# Altium PCB 2018-12-17_02-16-20.PcbDoc
Units mil, origin at the board's own origin, x right, y up, seen from the top; angles counter-clockwise.
Board outline 3500 x 5100 mil, 4 copper layers (Top Layer, MidLayer1, MidLayer2, Bottom Layer); 36 components, 19 nets, 102 pads, 114 vias.
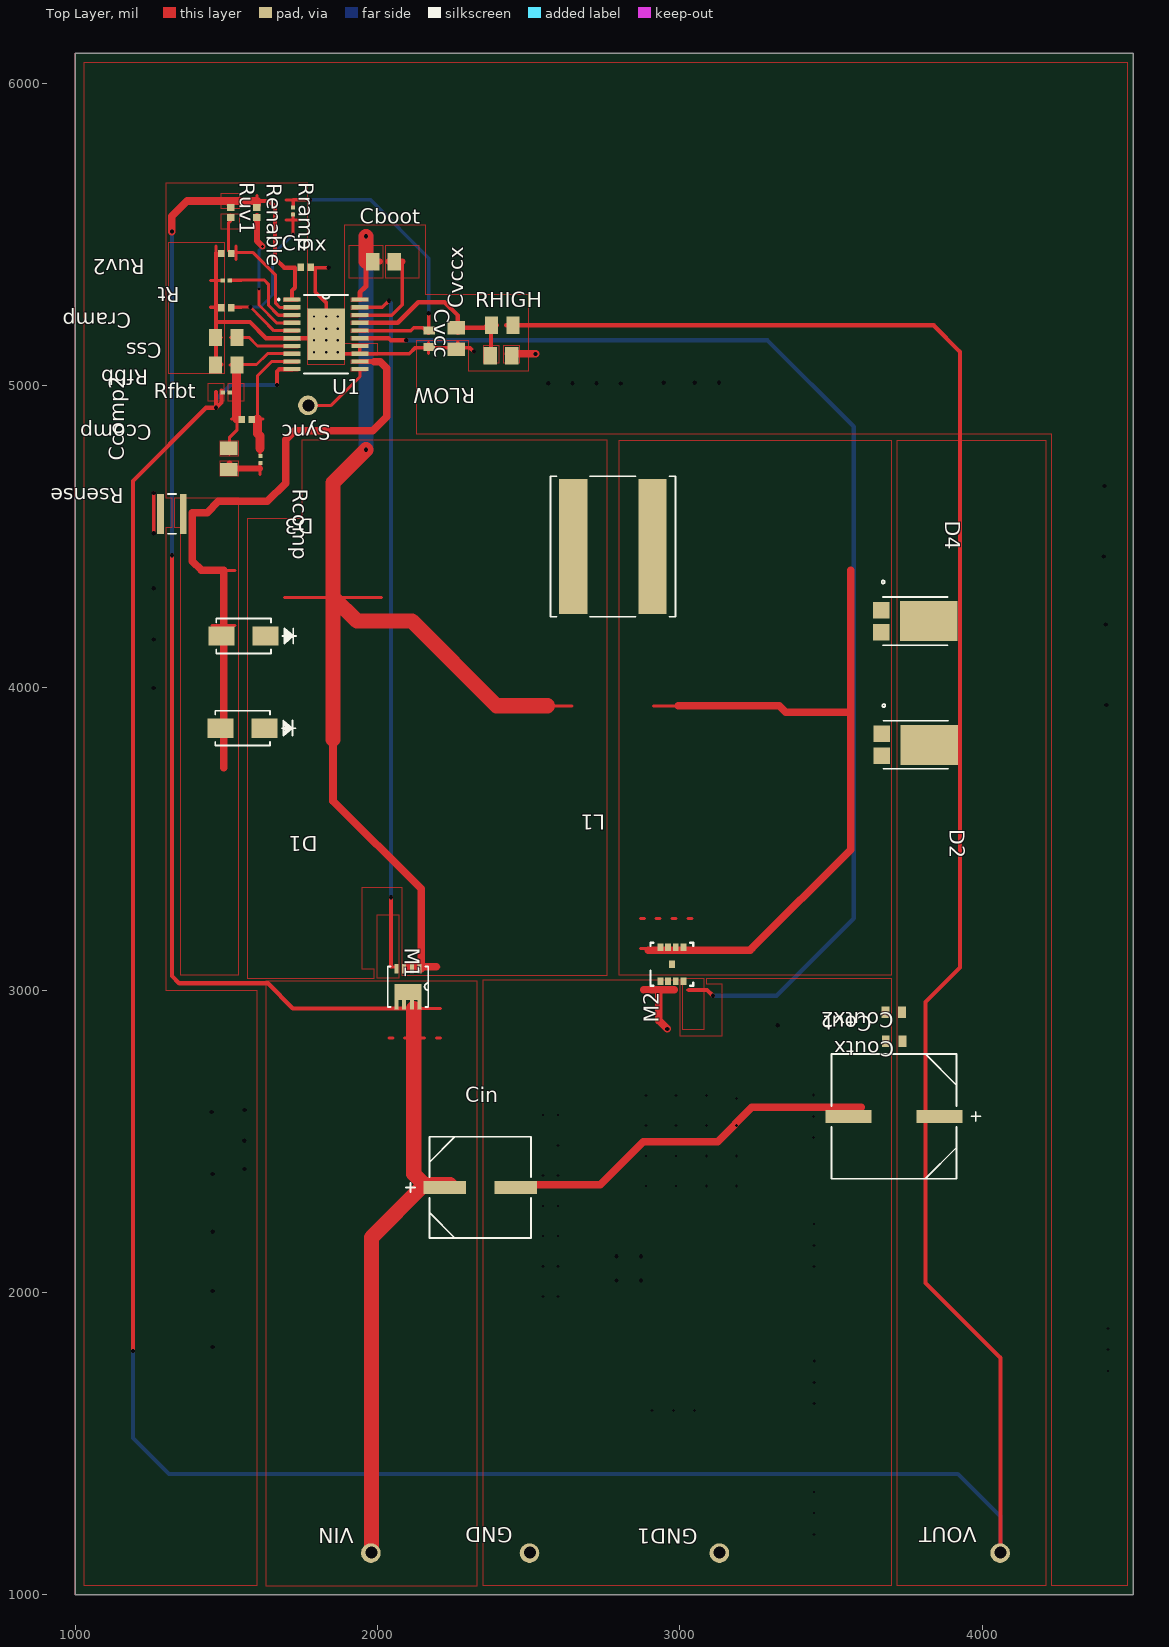
[diagram p0: Top Layer view]
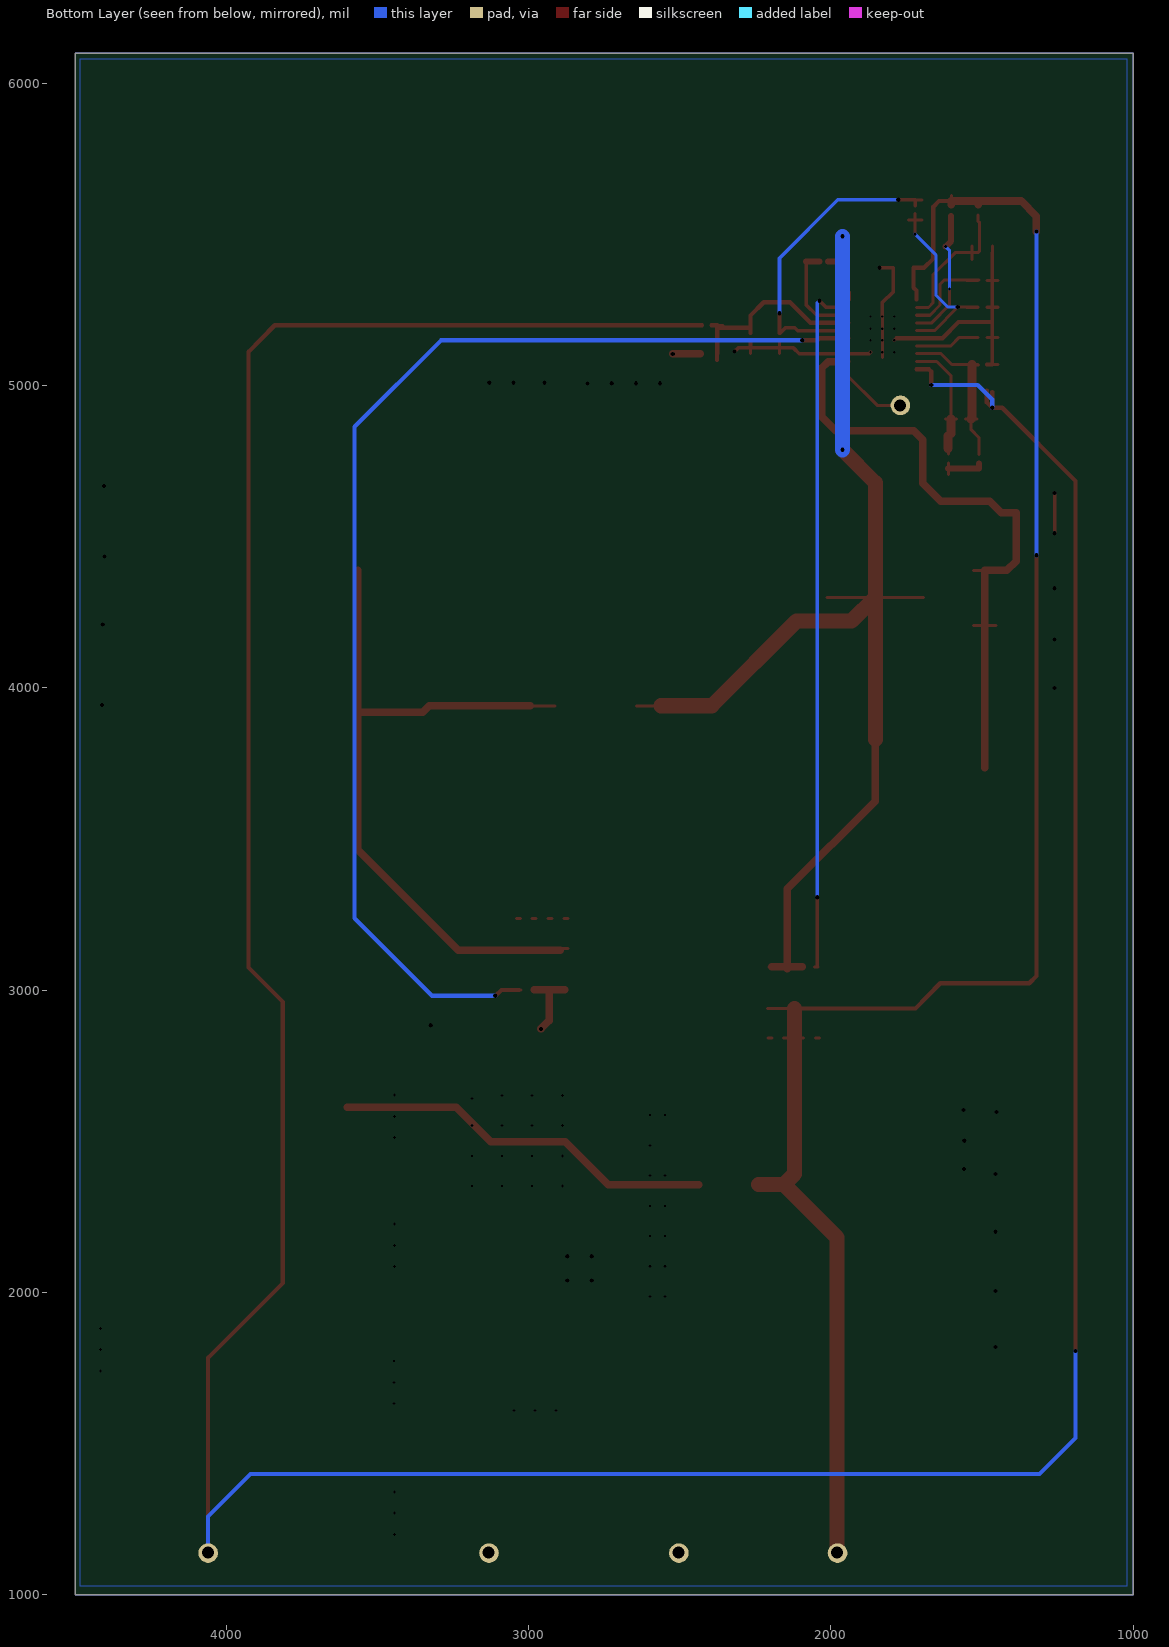
[diagram p1: Bottom Layer view, seen from below]

## Layer stack, top to bottom
Top Layer: signal copper 1.4
Dielectric: core 12.6, FR-4, Dk 4.8
MidLayer1: signal copper 1.4
Dielectric: prepreg 12.6, FR-4, Dk 4.8
MidLayer2: signal copper 1.4
Dielectric: core 12.6, FR-4, Dk 4.8
Bottom Layer: signal copper 1.4

## Board outline
1000,1000 4500,1000 4500,6100 1000,6100

## Design rules (kind name [scope] priority, off if disabled: settings)
PlaneConnect [All] p0: scope1count=1 scope1_0_kind=Board scope1_0_value=Board scope2count=1 scope2_0_kind=Board scope2_0_value=Board commentlength=0 planeconnectstyle=Direct reliefexpansion=20 reliefentries=4 reliefconductorwidth=10 reliefairgap=10
PlaneConnect [All] p1: planeconnectstyle=Direct reliefexpansion=20 reliefentries=4 reliefconductorwidth=10 reliefairgap=10
PolygonConnect [All] p0: scope1count=1 scope1_0_kind=Board scope1_0_value=Board scope2count=1 scope2_0_kind=Board scope2_0_value=Board commentlength=0 connectstyle=Direct reliefconductorwidth=10 reliefentries=4 polygonreliefangle="90 Angle"
PolygonConnect [All] p1: connectstyle=Direct reliefconductorwidth=10 reliefentries=4 polygonreliefangle="90 Angle"

## Components (designator, comment, footprint, x,y, rotation, side; value= is the part's Value field where it differs from the comment)
Cboot "" 0805 2020,5410 r0 top
Ccomp "" 0402 1568,4888 r180 top
Ccomp2 "" 0805 1508,4758 r90 top
Cin "" CAPSMT_62_E12 2340,2348 r0 top
Cinx "" 0402 1763,5392 r0 top
Cout "" CAPSMT_62_F12 3709,2583 r180 top
Coutx "" 0603 3709,2831 r180 top
Coutx2 "" 0603 3708,2928 r180 top
Cramp "" 0402 1500,5258 r180 top
Css "" 0805 1500,5159 r180 top
Cvcc "" 0603 2172,5155 r270 top
Cvccx "" 0805 2261,5156 r90 top
D1 "" SMA 1554,3867 r180 top
D2 "" PowerDI5 3781,3812 r270 top
D3 "" SMA 1557,4172 r180 top
D4 "" PowerDI5 3779,4221 r270 top
GND "" TP-1502 2503,1138 r180 top
GND1 "" TP-1502 3131,1138 r180 top
L1 "" XAL1010 2779,4468 r180 top
M1 "" PG-TSDSON-8 2101,3012 r270 top
M2 "" DQG0008A 2974,3086 r90 top
Rcomp "" 0201 1613,4756 r270 top
Renable "" 0402 1601,5573 r270 top
Rfbb "" 0805 1500,5068 r180 top
Rfbt "" 0201 1500,4978 r0 top
RHIGH "" 0805 2413,5200 r0 top
RLOW "" 0805 2409,5099 r180 top
Rramp "" 0201 1721,5578 r270 top
Rsense "" 0612 1320,4576 r180 top
Rt "" 0201 1500,5348 r180 top
Ruv1 "" 0402 1515,5573 r270 top
Ruv2 "" 0402 1500,5437 r180 top
Sync "" TP-1502 1770,4935 r180 top
U1 "" MXA20A 1830,5170 r0 top
VIN "" TP-1502 1978,1138 r180 top
VOUT "" TP-1502 4060,1138 r180 top

## Footprints (in the part's own frame and the unit in brackets; to place one, negate y for a bottom-side part, rotate by r counter-clockwise, add the part's x,y. Pads: shape width x height; smd on the part's side, far side on the other; paste and mask are expansions set on the pad)
0201 [mil]
  rect 14x13 smd: 1(-11.5,0) 2(11.5,0)
0402 [mil]
  rect 22x24 smd: 1(-16.5,0) 2(16.5,0)
0603 [mil]
  rect 26x38 smd: 1(-27.5,0) 2(27.5,0)
0612 [mil]
  rect 22x132 smd: 1(-37.5,0) 2(37.5,0)
  silkscreen extent -13,-66 13,66
0805 [mil]
  rect 44x57 smd: 1(-35.5,0) 2(35.5,0)
CAPSMT_62_E12 [mil]
  rect 140x43 smd: 1(-117,0) 2(117,0)
  silkscreen extent -246,-168 168,168
CAPSMT_62_F12 [mil]
  rect 152x43 smd: 1(-150.5,0) 2(150.5,0)
  silkscreen extent -286,-207 207,207
DQG0008A [mm]
  rect 0.63x0.5 smd: 1(-1.435,0.975) 2(-1.435,0.325) 3(-1.435,-0.325) 4(-1.435,-0.975) 5(1.435,-0.975) 6(1.435,-0.325) 7(1.435,0.325) 8(1.435,0.975) 9(0,0)
  silkscreen extent -1.8,-1.8 1.8,1.8
MXA20A [mil]
  rect 56x14 smd: 1(-112,115.16) 2(-112,89.57) 3(-112,63.98) 4(-112,38.39) 5(-112,12.8) 6(-112,-12.8) 7(-112,-38.39) 8(-112,-63.98) 9(-112,-89.57) 10(-112,-115.16) 11(112,-115.16) 12(112,-89.57) 13(112,-63.98) 14(112,-38.39) 15(112,-12.8) 16(112,12.8) 17(112,38.39) 18(112,63.98) 19(112,89.57) 20(112,115.16)
  rect 124x171 smd: 21(0,0)
  silkscreen extent -160,-130 74,130
PG-TSDSON-8 [mil]
  rect 31x13 smd: 1(-59.5,38.39) 2(-59.5,12.8) 3(-59.5,-12.8) 4(-59.5,-38.39) 5(59.5,-38.39) 6(59.5,-12.8) 7(59.5,12.8) 8(59.5,38.39)
  rect 52x90 smd: 9(18,0)
  silkscreen extent -67,-67 67,67
PowerDI5 [mil]
  rect 55x55 smd: 1(-36.22,-112.5) 3(36.22,-112.5)
  rect 132x191 smd: 2(0,44.5)
  silkscreen extent -134,-111 80,108
SMA [mil]
  rect 86x64 smd: 1(-73,0) 2(73,0)
  silkscreen extent -174,-58 90,58
TP-1502 [mil]
  round 65 / inner round 0 / far side round 65 hole 32: 1(0,0)
XAL1010 [mil]
  rect 94x445 smd: 1(-131,0) 2(131,0)
  silkscreen extent -207,-233 207,233

## Via types
v1: diameter 0, hole 10, Top Layer to Bottom Layer, 50 vias
v2: diameter 0, hole 14, Top Layer to Bottom Layer, 47 vias
v3: diameter 0, hole 8, Top Layer to Bottom Layer, 12 vias
v4: diameter 0, hole 40, Top Layer to Bottom Layer, 5 vias

## Nets (pads, with @x,y where several pads share a name; then routed paths per layer and width w, separated by ;. In a path a pad name is that pad's centre, name@x,y a point inside that pad or via, vN(x,y) a via of type N, cw(c..) or ccw(c..) an arc to the next point about the centre after c; other vN are vias at no path point)
0: Cin.2 Cinx.2 Cout.2 Coutx2.2 Coutx.2 Cramp.2 Css.2 Cvcc.2 Cvccx.1 GND1.1 GND.1 M2.1 M2.2 M2.3 Rfbb.2 RLOW.1 Rsense.2 Rt.2 Ruv2.2 U1.6 U1.13 U1.14 U1.17 U1.21 | length 4390.8
  Top Layer w10: Rfbb.2@1447,5069.5 Rfbb.2@1484,5069.5 ; Css.2@1447,5159.5 Css.2@1484,5159.5 ; 1447,5259.5 Cramp.2@1484,5259.5 ; 1447,5348.5 Rt.2@1484,5348.5 ; 1465.5,5417 1465.5,5462 ; U1.21@1829,5094 U1.21@1829,5245 ; 2169.5,5106 2169.5,5143 ; Cvccx.1@2265.5,5106 2265.5,5143 ; 2265.5,5173 2265.5,5210 ; 2357,5199.5 2394,5199.5 ; 2875,3001.5 2886,3001.5 ; 2925,3001.5 2936,3001.5 ; 2975,3001.5 2986,3001.5
  Top Layer w12: v2(1260,4512) 1260,4580 v2(1260,4645) ; Css.2@1466,5155 1466,5070 Rfbb.2@1484,5070 ; Css.2@1466,5160 1466,5260 1466,5349 1466,5440 ; U1.21@1783,5157 v3(1790,5150) ; v3(1830,5229) 1830,5275 1794,5310 1794,5390 v2(1839,5390) ; v3(1869,5110) 1874,5106 U1.13 ; U1.14@1942,5131 U1.13 ; 2266,5144 Cvccx.1@2266,5125 ; v2(2319,5113) 2306,5125 Cvccx.1@2266,5125 ; U1.13 2105,5106 2124,5125 2170,5125 Cvccx.1@2266,5125
  Top Layer w14: 1472,5211 1578,5211 1631,5157 1717,5157 U1.21@1783,5157 ; U1.17@1942,5208 2067,5208 2135,5276 2222,5276 2266,5232 2266,5192 ; 2266,5174 2266,5192 ; 2377,5085 2377,5105 2376,5106 2376,5200 ; 2395,5200 2376,5200 ; 2266,5192 2369,5192 2376,5200
  Top Layer w25: RLOW.1@2432,5105 2444,5105 v2(2523,5105) ; Cin.2@2437,2357 2737,2357 2879,2499 3125,2499 3239,2613 3600,2613 ; 2881,3001 2931,3001 ; v2(2959,2872) 2931,2900 2931,3001 ; 2981,3001 2931,3001
  other v1: 3444,1200 3444,1270 3444,1340 2909,1609 2979,1609 3049,1609 3445,1633 3445,1703 4416,1741 3445,1773 4416,1811 4416,1881 2548,1987 2598,1987 3444,2086 2548,2087 2598,2087 3444,2156 2548,2187 2598,2187 3444,2226 2548,2287 2598,2287 2888,2352 2988,2352 3088,2352 3188,2352 2548,2387 2598,2387 2888,2452 2988,2452 3088,2452 3188,2452 2598,2487 3443,2513 2888,2552 2988,2552 3088,2552 3188,2552 3443,2583 2548,2587 2598,2587 3188,2642 2888,2652 2988,2652 3088,2652 3443,2653
  other v2: 1455,1820 1455,2005 2791,2040 2872,2040 2791,2120 2872,2120 1455,2201 1455,2392 1560,2409 1559,2502 1452,2597 1561,2604 3324,2884 4411,3944 1260,4000 1260,4160 4409,4210 1260,4330 4403,4435 4405,4668 2805,5007 2565,5008 2645,5008 2725,5008 2947,5010 3050,5010 3130,5010
  other v3: 1790,5110 1830,5110 1830,5150 1869,5150 1790,5189 1830,5189 1869,5189 1790,5229 1869,5229
  other v4: 2504,1140 3132,1140
1: Ccomp2.1 Rcomp.2 | length 155
  Top Layer w10: 1611.5,4707 Rcomp.2@1611.5,4744
  Top Layer w20: Ccomp2.1@1510,4742 1510,4726 1612,4726
2: Cin.1 Cinx.1 Cvccx.2 M1.5 M1.6 M1.7 M1.8 M1.9 Renable.1 RHIGH.1 RLOW.2 Ruv1.1 U1.1 VIN.1 | length 6344.9
  Top Layer w10: Renable.1@1601.5,5592 1601.5,5629 ; 2038,2841.5 2051,2841.5 ; 2038,2939.5 2209,2939.5 ; 2090,2841.5 2103,2841.5 ; 2143,2841.5 2156,2841.5 ; 2195,2841.5 2208,2841.5
  Top Layer w14: v2(1320,4439) 1320,3047 1344,3023 1638,3023 1720,2940 M1.7@2120,2940 ; 1602,5611 1642,5611 1661,5592 1661,5421 1692,5390 1727,5390 1727,5324 1717,5315 U1.1@1717,5285
  Top Layer w25: v2(1320,5510) 1320,5560 1371,5611 1513,5611 ; Ruv1.1@1513,5598 1513,5611 ; Renable.1@1602,5598 1602,5611 1513,5611
  Top Layer w50: v4(1980,1140) 1980,2182 Cin.1@2155,2357 ; M1.7@2120,2940 2120,2392 Cin.1@2155,2357 ; Cin.1@2240,2357 Cin.1@2155,2357
  Bottom Layer w14: v2(1320,4439) v2(1320,5510)
3: Cout.1 Coutx2.1 Coutx.1 D2.2 D4.2 Rfbt.1 RHIGH.2 U1.10 VOUT.1 | length 12797.2
  Top Layer w10: 2424,5199.5 RHIGH.2@2461,5199.5
  Top Layer w14: v2(1191,1807) 1191,4685 1433,4927 v2(1466,4927) ; 1466,4979 v2(1466,4927) ; Rfbt.1@1484,4984 1484,4944 v2(1466,4927) ; v2(1668,5002) 1668,5047 1675,5054 U1.10@1717,5054 ; 2426,5200 2443,5200 3840,5200 3927,5112 3927,4300 3927,3830 3927,3075 3813,2961 3813,2032 4061,1784 v4(4061,1140)
  Bottom Layer w14: v2(1191,1807) 1191,1519 1310,1400 3920,1400 4061,1259 v4(4061,1140) ; v2(1466,4927) 1466,4954 1514,5002 v2(1668,5002)
4: D2.1 D2.3 D4.1 D4.3 L1.1 M2.5 M2.6 M2.7 M2.8 M2.9 | length 2710.2
  Top Layer w10: 2870,3138.5 3041,3138.5 ; 2870,3237.5 2883,3237.5 ; 2913,3940.5 3076,3940.5 ; 2922,3237.5 2935,3237.5 ; 2975,3237.5 2988,3237.5 ; 3027,3237.5 3040,3237.5
  Top Layer w25: 2896,3133 3180,3133 3233,3133 3239,3139 3565,3465 3565,3736 3565,3905 ; 2995,3941 3329,3941 3350,3920 3565,3920 3565,3919 3565,3905 ; 3565,4389 3565,4206 3565,3905
5: M2.4 U1.15 | length 4050.7
  Top Layer w10: 3025,3001.5 3036,3001.5
  Top Layer w14: U1.15@1942,5157 2037,5157 2045,5150 v2(2095,5150) ; 3031,3001 3090,3001 v2(3110,2982)
  Bottom Layer w14: v2(2095,5150) 3290,5150 3576,4864 3576,3238 3320,2982 v2(3110,2982)
6: Cvcc.1 Rramp.1 U1.16 | length 1118.7
  Top Layer w10: 1698,5614.5 1743,5614.5 ; Cvcc.1@2169.5,5173 2169.5,5210
  Top Layer w12: Rramp.1@1721,5596 1721,5615 v2(1777,5615) ; U1.16@1942,5182 2110,5182 2120,5192 2150,5192 2170,5173 2170,5192 v2(2170,5240)
  Bottom Layer w12: v2(1777,5615) 1977,5615 2170,5422 v2(2170,5240)
7: Css.1 U1.7 | length 248.3
  Top Layer w10: Css.1@1514,5159.5 Css.1@1551,5159.5 ; Css.1@1518,5160 1533,5160 1575,5160 1603,5131 U1.7@1717,5131
8: Renable.2 U1.4 | length 477.2
  Top Layer w10: 1601.5,5525 Renable.2@1601.5,5562 ; v1(1608,5320) 1608,5267 1666,5208 U1.4@1717,5208
  Top Layer w20: Renable.2@1602,5561 1602,5544 1602,5478 v1(1620,5460)
  Bottom Layer w10: v1(1608,5320) 1608,5448 v1(1620,5460)
9: Cboot.2 U1.18 | length 342.5
  Top Layer w12: U1.18@1942,5233 2047,5233 2082,5268 2082,5411
  Top Layer w20: Cboot.2@2037,5411 2082,5411
10: Ccomp2.2 Ccomp.2 Rfbb.1 Rfbt.2 U1.8 | length 603.3
  Top Layer w10: Ccomp2.2@1510,4773 1510,4793 1510,4828 1536,4854 1536,4890 ; 1512,5069 1532,5069 1533,5070 1600,5070 1636,5106 U1.8@1717,5106 ; Rfbb.1@1514,5069.5 Rfbb.1@1551,5069.5 ; 1517,4889.5 Ccomp.2@1554,4889.5
  Top Layer w30: Rfbb.1@1533,5070 1533,4979 1533,4893 1536,4890
11: Ruv1.2 Ruv2.1 U1.2 | length 507
  Top Layer w10: Ruv1.2@1513,5565 1513,5544 1508,5539 1508,5446 1514,5440 1533,5440 1589,5440 1662,5367 1662,5274 1677,5259 U1.2@1717,5259 ; 1532.5,5417 1532.5,5462
12: D1.2 D3.2 Rsense.1 U1.12 | length 2197.3
  Top Layer w10: 1453,4206 1528,4206 ; 1453,4389 1528,4389
  Top Layer w15: U1.12@1942,5080 1990,5080
  Top Layer w25: 1491,3736 1491,3919 1491,4206 1491,4389 1418,4389 1387,4420 1387,4580 1437,4580 1474,4617 1636,4617 1696,4677 1696,4821 1726,4851 1984,4851 2031,4898 2031,5058 2009,5079 1990,5079
13: Cramp.1 Rramp.2 U1.5 | length 698.3
  Top Layer w10: Cramp.1@1514,5259.5 1551,5259.5 ; Cramp.1@1520,5260 1533,5260 v2(1580,5260) 1657,5182 U1.5@1717,5182 ; 1698,5547.5 1743,5547.5 ; v1(1721,5501) 1721,5548 Rramp.2@1721,5569
  Bottom Layer w10: v2(1580,5260) 1613,5260 1653,5300 1653,5433 v1(1721,5501)
15: M1.4 U1.19 | length 2322
  Top Layer w10: 2043,3077.5 2054,3077.5
  Top Layer w12: U1.19@1942,5259 2016,5259 v2(2038,5281) ; 2045,3078 v2(2045,3308)
  Bottom Layer w12: v2(2038,5281) 2045,5274 v2(2045,3308)
16: Ccomp.1 Rcomp.1 U1.9 | length 451.2
  Top Layer w10: Ccomp.1@1584,4889.5 1621,4889.5 ; 1603,4890 1603,5033 1650,5080 U1.9@1717,5080 ; Rcomp.1@1611.5,4774 1611.5,4811
  Top Layer w30: 1603,4890 1603,4842 1612,4833 1612,4793
17: Rt.1 U1.3 | length 332.8
  Top Layer w10: Rt.1@1510,5349 1533,5349 1626,5349 1639,5336 1639,5267 1672,5233 U1.3@1717,5233 ; Rt.1@1514,5348.5 1551,5348.5
18: Cboot.1 D1.1 D3.1 L1.2 M1.1 M1.2 M1.3 U1.20 | length 4320.7
  Top Layer w10: 1693,4299.5 2013,4299.5 ; M1.3@2093,3077.5 2104,3077.5 ; M1.1@2143,3077.5 2154,3077.5 ; 2193,3077.5 2204,3077.5 ; 2480,3940.5 2643,3940.5
  Top Layer w16: U1.20@1942,5285 1942,5309 1962,5328 1962,5411
  Top Layer w20: 1962,5411 2009,5411
  Top Layer w25: 1853,3830 1853,3626 2145,3335 M1.1@2145,3078 ; 2095,3078 M1.1@2138,3078 ; M1.1@2145,3071 M1.1@2145,3078 ; 2195,3078 M1.1@2145,3078
  Top Layer w50: 1853,3830 1853,4300 ; v2(1962,4788) 1853,4679 1853,4300 ; 1962,5411 v2(1962,5494) ; 2562,3941 2394,3941 2114,4221 1932,4221 1853,4300
  Bottom Layer w50: v2(1962,4788) v2(1962,5494)
20: Sync.1 U1.11 | length 233.4
  Top Layer w10: v4(1772,4935) 1847,4935 1942,5030 U1.11@1942,5054

## Polygon pours and split planes (outlines as drawn)
3 on Top Layer " " (solid, pour order 0): 1440,4949 1440,5008 1491,5008 1491,4949
10 on Top Layer " " (solid, pour order 1): 1507,4949 1507,5008 1558,5008 1558,4949
10 on Top Layer " " (solid, pour order 2): 1480,4767 1480,4818 1539,4818 1539,4767
1 on Top Layer " " (solid, pour order 3): 1480,4700 1480,4751 1539,4751 1539,4700
2 on Top Layer " " (solid, pour order 4): 1690,5278 1690,5291 1736,5291 1736,5278
11 on Top Layer " " (solid, pour order 5): 1690,5252 1690,5265 1736,5265 1736,5252
17 on Top Layer " " (solid, pour order 6): 1690,5227 1690,5240 1736,5240 1736,5227
8 on Top Layer " " (solid, pour order 7): 1690,5201 1690,5214 1736,5214 1736,5201
13 on Top Layer " " (solid, pour order 8): 1690,5175 1690,5188 1736,5188 1736,5175
7 on Top Layer " " (solid, pour order 9): 1690,5124 1690,5137 1736,5137 1736,5124
10 on Top Layer " " (solid, pour order 10): 1690,5099 1690,5112 1736,5112 1736,5099
16 on Top Layer " " (solid, pour order 11): 1690,5073 1690,5086 1736,5086 1736,5073
3 on Top Layer " " (solid, pour order 12): 1690,5047 1690,5060 1736,5060 1736,5047
18 on Top Layer " " (solid, pour order 13): 1914,5278 1914,5291 1961,5291 1961,5278
15 on Top Layer " " (solid, pour order 14): 1914,5252 1914,5265 1961,5265 1961,5252
9 on Top Layer " " (solid, pour order 15): 1914,5227 1914,5240 1961,5240 1961,5227
6 on Top Layer " " (solid, pour order 16): 1914,5175 1914,5188 1961,5188 1961,5175
5 on Top Layer " " (solid, pour order 17): 1914,5150 1914,5163 1961,5163 1961,5150
12 on Top Layer " " (solid, pour order 18): 1914,5073 1914,5086 1961,5086 1961,5073
20 on Top Layer " " (solid, pour order 19): 1914,5047 1914,5060 1961,5060 1961,5047
9 on Top Layer " " (solid, pour order 20): 2027,5355 2027,5465 2137,5465 2137,5355
18 on Top Layer " " (solid, pour order 21): 1907,5355 1907,5465 2017,5465 2017,5355
11 on Top Layer " " (solid, pour order 22): 1483,5518 1483,5569 1542,5569 1542,5518
2 on Top Layer " " (solid, pour order 23): 1483,5585 1483,5636 1542,5636 1542,5585
18 on Top Layer " " (solid, pour order 24): 2760,3050 2760,4820 1750,4820 1750,4560 1569,4560 1569,3040 1990,3040 1990,3070 1950,3070 1950,3340 2080,3340 2080,3050
3 on Top Layer " " (solid, pour order 25): 3720,4820 4210,4820 4210,1030 3720,1030
12 on Top Layer " " (solid, pour order 26): 1540,4630 1540,3050 1350,3050 1350,4530 1330,4530 1330,4630
5 on Top Layer " " (solid, pour order 27): 3010,3040 3080,3040 3080,2870 3010,2870
4 on Top Layer " " (solid, pour order 28): 3699,4820 3699,3050 2800,3050 2800,4820
15 on Top Layer " " (solid, pour order 29): 2000,3250 2070,3250 2070,3040 2000,3040
2 on Top Layer " " (solid, pour order 30): 2330,1030 2330,3030 1630,3030 1630,1030
0 on Top Layer " " (solid, pour order 31): 1690,5150 1690,5163 1736,5163 1736,5150
0 on Top Layer " " (solid, pour order 32): 1914,5201 1914,5214 1961,5214 1961,5201
0 on Top Layer " " (solid, pour order 33): 1914,5099 1914,5112 1961,5112 1961,5099
0 on Top Layer " " (solid, pour order 34): 2351,5075 2351,5134 2402,5134 2402,5075
0 on Top Layer " " (solid, pour order 35): 2418,5075 2418,5134 2469,5134 2469,5075
0 on Top Layer " " (solid, pour order 37): 2500,5300 2160,5300 2160,5530 1890,5530 1890,5140 2000,5140 2000,5100 1890,5100 1890,5070 1770,5070 1770,5670 1300,5670 1300,4630 1320,4630 1320,4530 1300,4530 1300,3000 1600,3000 1600,1030 1030,1030 1030,6070 4480,6070 4480,1030 4230,1030 4230,4840 2130,4840 2130,5150 2300,5150 2300,5050 2500,5050
0 on Top Layer " " (solid, pour order 38): 2350,3035 3000,3035 3000,2850 3140,2850 3140,3020 3090,3020 3090,3040 3700,3040 3700,1030 2350,1030
0 on Top Layer " " (solid, pour order 39): 1493,5474 1493,5039 1310,5039 1310,5370 1310,5391 1310,5474
0 on Bottom Layer " " (solid, pour order 36): 4485,6080 4485,1030 1020,1030 1020,6080

## Other copper
Multi-Layer:
  the board outline again, w1